# EAGLE board kosmoc_svf (EAGLE 9.6.2)
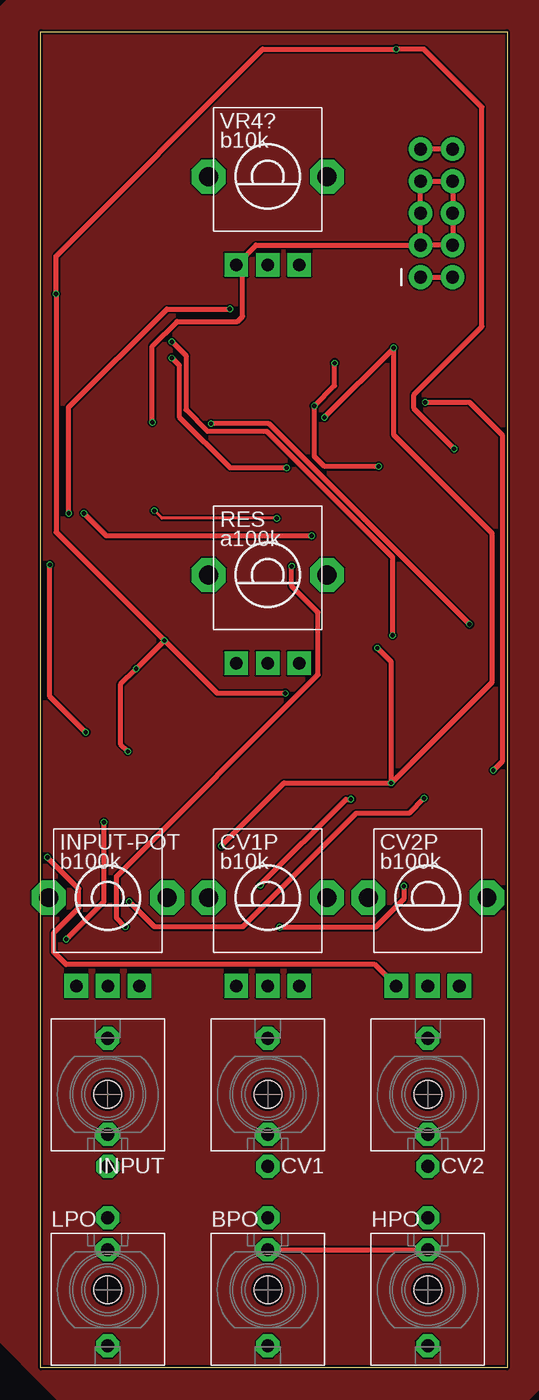
[diagram p0: board, top side]
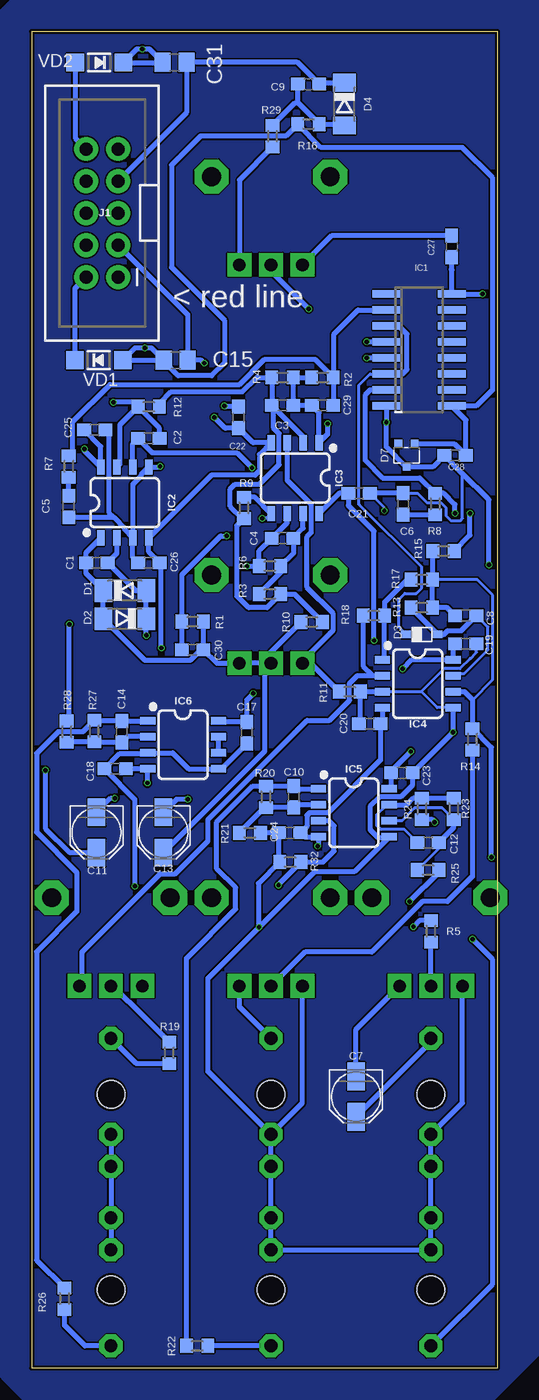
[diagram p1: board, bottom side, seen from below]

Size 37 x 106 mm. Coordinates in mm from the lower left corner, seen from the top.
Outline: 0,0 0,106 37,106 37,0 0,0
Copper layers (1*16): Top 0.035mm / dielectric 1.6mm / Bottom 0.035mm
Design rules "jlcpcb-2layers": minimum track width 5mil, minimum drill 0.3mm, track to track 5mil, track to pad 5mil, pad to pad 5mil, via to via 5mil, smd to smd 5mil, copper to edge 0.2mm, drill to drill 6mil, minimum pad ring 10mil, minimum via ring 3mil, stop-mask expansion 4mil, vias tented up to drill 0mil, thermal gap 10mil

## Footprints (pad centres in the part's own frame; a part is rotated, then mirrored left to right if it is on the bottom)
WQP_PJ_301M6 = drill 1.016 pad 1.778 octagon: P1 0,-5.715; P2 0,-3.175; P3 0,4.445 | hole 2.2: 0,0
C0603 = smd 1.1 x 1: 1 -0.85,0; 2 0.85,0
PANASONIC_B = smd 2.2 x 1.4: + 1.6,0; - -1.6,0
C0805 = smd 1.3 x 1.5: 1 -0.95,0; 2 0.95,0
ALPS_POT_VERTICAL_PS = drill 1 pad 1.88 square: P$1 -2.5,7; P$2 0,7; P$3 2.5,7 | drill 1.5 pad 2.54 octagon: P$4 -4.7,0; P$5 4.7,0
DIODE_SOD80C = smd 1.4 x 1.8: A 1.7,0; C -1.7,0
SOD323R-INFINEON = smd 0.8 x 0.6: A 1.25,0; C -1.25,0
SOT323 = smd 0.6 x 0.6: 1 -0.65,-0.925; 2 0.65,-0.925; 3 0,0.925
SOIC16N = smd 0.6 x 2.2: 1 -4.445,-2.6; 2 -3.175,-2.6; 3 -1.905,-2.6; 4 -0.635,-2.6; 5 0.635,-2.6; 6 1.905,-2.6; 7 3.175,-2.6; 8 4.445,-2.6; 9 4.445,2.6; 10 3.175,2.6; 11 1.905,2.6; 12 0.635,2.6; 13 -0.635,2.6; 14 -1.905,2.6; 15 -3.175,2.6; 16 -4.445,2.6
SO08 = smd 0.6 x 1.2: 1 -1.905,-2.8; 2 -0.635,-2.8; 3 0.635,-2.8; 4 1.905,-2.8; 5 1.905,2.8; 6 0.635,2.8; 7 -0.635,2.8; 8 -1.905,2.8
2X5-SHROUDED = drill 1.016 pad 1.88: 1 -1.27,5.08; 2 1.27,5.08; 3 -1.27,2.54; 4 1.27,2.54; 5 -1.27,0; 6 1.27,0; 7 -1.27,-2.54; 8 1.27,-2.54; 9 -1.27,-5.08; 10 1.27,-5.08
R0603 = smd 1 x 1.1: 1 -0.85,0; 2 0.85,0
SOD123 = smd 1.4 x 1.4: A 1.905,0; C -1.905,0

## Placement (x,y rotation side)
BPO  PJ301_THONKICONN6  [WQP_PJ_301M6]  18,6.2 180 top
C1  220p  [C0603]  31.82,63.88 180 bottom
C2  220p  [C0603]  27.7,73.72 0 bottom
C3  22p  [C0603]  17.08,76.34 0 bottom
C4  22p  [C0603]  17.08,65.82 0 bottom
C5  680p  [C0603]  34.05,68.32 90 bottom
C6  680p  [C0603]  7.51,68.53 270 bottom
C7  1u  [PANASONIC_B]  11.24,21.52 270 bottom
C8  560p  [C0603]  2.54,59.67 0 bottom
C9  100n  [C0603]  15.02,101.83 180 bottom
C10  22p  [C0603]  16.18,45.3 90 bottom
C11  2.2u  [PANASONIC_B]  31.84,42.47 270 bottom
C12  22p  [C0603]  5.53,41.67 180 bottom
C13  2.2u  [PANASONIC_B]  26.53,42.47 270 bottom
C14  22p  [C0603]  29.83,50.47 90 bottom
C15  10u X5R  [C0805]  25.57,79.93 0 bottom
C17  100n  [C0603]  19.91,50.38 90 bottom
C18  100n  [C0603]  30.37,47.53 180 bottom
C19  100n  [C0603]  2.54,57.45 180 bottom
C20  100n  [C0603]  10.16,51.1 180 bottom
C21  100n  [C0603]  11,69.38 180 bottom
C22  100n  [C0603]  20.57,75.39 90 bottom
C23  100n  [C0603]  7.61,47.2 180 bottom
C24  100n  [C0603]  16.5,42.44 180 bottom
C25  100n  [C0603]  31.99,74.42 180 bottom
C26  100n  [C0603]  27.7,63.88 180 bottom
C27  100n  [C0603]  3.66,88.95 270 bottom
C28  100n  [C0603]  3.38,72.39 180 bottom
C29  5p  [C0603]  13.91,76.34 0 bottom
C30  5p  [C0603]  24.22,56.98 180 bottom
C31  10u X5R  [C0805]  25.65,103.56 180 bottom
CV1  PJ301_THONKICONN6  [WQP_PJ_301M6]  18,21.7 0 top
CV1P  b10k  [ALPS_POT_VERTICAL_PS]  18,37.3 180 top
CV2  PJ301_THONKICONN6  [WQP_PJ_301M6]  30.7,21.7 0 top
CV2P  b100k  [ALPS_POT_VERTICAL_PS]  30.7,37.3 180 top
D1  4.7  [DIODE_SOD80C]  29.6,61.66 0 bottom
D2  4.7  [DIODE_SOD80C]  29.6,59.43 180 bottom
D3  1N4148WX-TP  [SOD323R-INFINEON]  6.03,58.19 0 bottom
D4  4.7  [DIODE_SOD80C]  12.16,100.24 270 bottom
D7  BAT854W  [SOT323]  7.24,72.39 180 bottom
HPO  PJ301_THONKICONN6  [WQP_PJ_301M6]  30.7,6.2 180 top
IC1  SSM2164S  [SOIC16N]  6.24,80.74 270 bottom
IC2  TL072  [SO08]  29.6,68.64 0 bottom
IC3  TL072  [SO08]  16.08,70.58 180 bottom
IC4  TL072  [SO08]  6.35,54.28 270 bottom
IC5  TL072  [SO08]  11.42,44.03 270 bottom
IC6  TL072  [SO08]  24.97,49.43 270 bottom
INPUT  PJ301_THONKICONN6  [WQP_PJ_301M6]  5.3,21.7 0 top
INPUT-POT  b100k  [ALPS_POT_VERTICAL_PS]  5.3,37.3 180 top
J1  [2X5-SHROUDED]  31.4,91.6 180 bottom
LPO  PJ301_THONKICONN6  [WQP_PJ_301M6]  5.3,6.2 180 top
R1  15k  [R0603]  24.22,59.2 180 bottom
R2  15k  [R0603]  13.91,78.56 0 bottom
R3  15k  [R0603]  18.08,61.37 0 bottom
R4  15k  [R0603]  17.08,78.56 0 bottom
R5  100k  [R0603]  5.29,34.63 90 bottom
R6  33k  [R0603]  18.08,63.59 0 bottom
R7  360  [R0603]  34.05,71.5 90 bottom
R8  360  [R0603]  4.97,68.53 90 bottom
R9  3k  [R0603]  20.15,68.22 270 bottom
R10  30k  [R0603]  14.77,59.17 0 bottom
R11  4k  [R0603]  11.75,53.64 180 bottom
R12  15k  [R0603]  27.7,76.24 180 bottom
R13  100k  [R0603]  6.03,60.31 180 bottom
R14  100k  [R0603]  2.02,49.86 90 bottom
R15  100k  [R0603]  4.3,64.8 180 bottom
R16  820  [R0603]  15.02,98.65 180 bottom
R17  100k  [R0603]  6.03,62.53 0 bottom
R18  100k  [R0603]  9.84,59.67 0 bottom
R19  270k  [R0603]  26.07,25 90 bottom
R20  68k  [R0603]  18.41,45.3 90 bottom
R21  22k  [R0603]  19.68,42.44 180 bottom
R22  1k  [R0603]  23.85,1.76 0 bottom
R23  33k  [R0603]  3.49,44.34 90 bottom
R24  1k  [R0603]  6.02,44.35 270 bottom
R25  22k  [R0603]  5.53,39.49 180 bottom
R26  1k  [R0603]  34.38,5.5 270 bottom
R27  33k  [R0603]  32.02,50.51 90 bottom
R28  22k  [R0603]  34.21,50.47 270 bottom
R29  2.7k  [R0603]  17.88,97.7 270 bottom
R32  17k  [R0603]  16.47,40.12 0 bottom
RES  a100k  [ALPS_POT_VERTICAL_PS]  18,62.9 180 top
VD1  SS12L  [SOD123]  31.66,79.94 0 bottom
VD2  SS12L  [SOD123]  31.63,103.53 180 bottom
VR4?  b10k  [ALPS_POT_VERTICAL_PS]  18,94.5 180 top

## Library data of the parts
BPO CV1 CV2 HPO INPUT LPO = og-pj301
C1-C15 C17-C31 = rcl; SPICEPREFIX: C
CV1P CV2P INPUT-POT RES VR4? = pot-alps
D1-D4 = Diode-SMD
D7 = nxp_60
IC1 = ssm2164
IC2-IC6 = SparkFun-IC-Amplifiers; PROD_ID: NA-XXXXX
J1 = SparkFun-Connectors; PROD_ID: CONN-08671; SF_ID: PRT-08506
R1-R29 R32 = rcl; SPICEPREFIX: R
VD1 VD2 = diode

## Nets
AGND: BPO.P1 BPO.P2 C5.1 C6.1 C9.1 C15.2 C17.1 C18.2 C19.1 C20.2 C21.1 C22.2 C23.1 C24.2 C25.1 C26.2 C27.1 C28.2 C31.1 CV1.P1 CV1.P2 CV1P.P$3 CV2.P1 CV2.P2 D4.C D7.3 HPO.P1 HPO.P2 IC1.8 IC2.3 IC2.5 IC3.5 IC4.3 IC4.5 IC5.5 IC6.3 IC6.5 INPUT-POT.P$3 INPUT.P1 INPUT.P2 J1.3 J1.4 J1.5 J1.6 J1.7 J1.8 LPO.P1 LPO.P2 R9.1 R11.1 R21.1 R32.1 VR4?.P$3
N$1: C1.1 D1.A D2.C IC1.4 IC2.2
N$2: C2.1 IC1.5 IC2.6
N$3: R15.1 VR4?.P$2
N$4: C30.2 IC1.7 R1.2 R8.2
N$5: C3.2 C29.1 IC3.1 R2.1 R4.2 R28.1
N$6: C29.2 IC1.2 R2.2 R7.2
N$7: C9.2 D4.A R16.1 R29.1
N$8: C4.2 IC3.7 R3.1 R6.2
N$9: C3.1 IC3.2 R3.2 R4.1 R9.2 R10.2 R12.1
N$10: C4.1 IC3.6 R5.2 R6.1
N$11: R29.2 VR4?.P$1
N$12: C2.2 C11.+ IC2.7 R12.2
N$13: C7.- INPUT-POT.P$1
N$14: C7.+ INPUT.P3
N$15: C5.2 R7.1
N$16: C6.2 R8.1
N$17: C8.2 D3.A IC4.7 R13.2
N$18: D3.C IC1.3 IC1.6
N$19: CV1P.P$2 R14.1
N$20: INPUT-POT.P$2 R5.1
N$21: CV1.P3 CV1P.P$1
N$22: HPO.P3 R26.2
N$23: IC4.1 R17.1 R18.2
N$24: LPO.P3 R24.2
N$25: BPO.P3 R22.2
N$26: C10.1 IC5.2 R20.1 R21.2
N$27: CV2.P3 R19.1
N$28: CV2P.P$2 R19.2
N$29: C10.2 IC5.1 R20.2 R22.1
N$30: C13.- IC5.3 R32.2
N$31: C12.1 IC5.6 R23.1 R25.2
N$33: C12.2 IC5.7 R23.2 R24.1
N$34: C11.- R25.1
N$37: IC6.6 IC6.7
N$39: C14.2 IC6.1 R26.1 R27.2
N$40: C14.1 IC6.2 R27.1 R28.2
N$42: J1.1 J1.2 VD1.C
N$43: J1.9 J1.10 VD2.A
TO_CV2_POT1: C8.1 CV2P.P$3 IC4.6 R13.1 R14.2 R15.2 R17.2
TO_CV2_POT2: CV2P.P$1 IC4.2 R18.1
TO_RESO_POT1: C1.2 C13.+ C30.1 D1.C D2.A IC2.1 R1.1 R10.1 RES.P$1 RES.P$2
TO_RESO_POT2: IC3.3 R11.2 RES.P$3
V+: C17.2 C19.2 C21.2 C23.2 C25.2 C27.2 C31.2 IC1.16 IC2.8 IC3.8 IC4.8 IC5.8 IC6.8 VD2.C
V-: C15.1 C18.1 C20.1 C22.1 C24.1 C26.1 C28.1 D7.1 IC1.9 IC2.4 IC3.4 IC4.4 IC5.4 IC6.4 R16.2 VD1.A

## Tracks (layer width: path | path; a pad name or v marks a point on that pad's centre or on a via)
AGND  (via drill 0.35)
  Top 0.254: v18.7,67.4 9.6,67.4 v9,68
  Top 0.406: J1.3 J1.4 J1.6 J1.8 J1.7 J1.5 J1.3 | BPO.P2 HPO.P2 | J1.3 17.06,89.06 VR4?.P$3 16,87 16,83.4 15.6,83 10.8,83 8.84,81.04 v8.84,75 | v23.3,79.7 23.3,77.9 v21.7,76.3 21.7,72.3 22.5,71.5 v26.8,71.5 | v28.8,38.2 28.8,37.2 26.55,34.95 v18.95,34.95 | v3.55,50.41 0.7,53.27 v0.7,63.7
  Bottom 0.254: C19.1 1.69,56.75 2.2,56.25 2.2,56.28 3.01,55.47 4.25,55.47 6.08,53.64 | IC4.3 6.08,53.64 | IC4.5 4.81,52.37 6.08,53.64 | C6.1 6.38,69.38 5.62,68.63 4.51,68.63 4.11,68.23 4.11,67.59 3.71,67.19 2.99,67.19 2.79,67.39 2.79,70.95 | IC3.5 18.37,67.4 v18.7,67.4 | v9,68 9,68.22 C21.1
  Bottom 0.406: J1.3 24.61,83.55 C15.2 23.53,79.93 v23.3,79.7 | J1.7 24.7,99.56 C31.1 15.9,103.56 C9.1 14.06,101.94 D4.C | C26.2 28.96,64.3 IC2.3 | IC2.3 29.61,66.48 29.61,66.58 30.5,67.47 | C5.1 30.5,67.47 | IC2.3 28.96,70.07 28.34,70.7 28.34,70.8 IC2.5 26.86,71.44 v26.8,71.5 | C20.2 10.9,51.22 R11.1 IC4.3 | C17.1 21.91,47.53 IC6.5 24.53,47.53 25.8,48.8 IC6.3 27.83,48.74 30.01,48.74 C18.2 28.8,45.11 v28.8,38.2 | R21.1 C24.2 17.35,40.16 R32.1 19,38.44 19,35 v18.95,34.95 | CV1.P2 CV1.P1 BPO.P1 BPO.P2 LPO.P2 LPO.P1 INPUT.P1 INPUT.P2 2.8,21.02 INPUT-POT.P$3 | CV2.P2 CV2.P1 HPO.P1 HPO.P2 | CV1.P2 15.5,21.02 CV1P.P$3 | C27.1 13.2,89.8 VR4?.P$3 | IC4.5 v3.55,50.41 C23.1 6.79,47.17 6.79,46.2 7.69,45.3 9.36,45.3 10.13,44.52 10.13,42.7 9.52,42.08 8.66,42.08 IC5.5 11.35,39.4 14.5,39.4 v18.95,34.95 | C22.2 21.64,76.24 v21.7,76.3 | C25.1 31.14,74.37 30.88,74.11 30.88,67.85 30.5,67.47 | IC3.5 19.27,69.07 R9.1 | C6.1 C21.1 | CV1.P2 23,23.52 23,30.9 v18.95,34.95 | IC1.8 v8.84,75 8.84,73.06 D7.3 5.16,71.47 C28.2 2.79,70.95 0.7,68.86 v0.7,63.7
GND
  pour Bottom: 34,-6 41,1 41,3 41,106 37,110 -2,110 -5,107 -5,3 0,-2 4,-6
  pour Top: 35,-6 42,1 42,3 42,106 38,110 -1,110 -4,107 -4,3 1,-2 5,-6
N$1  (via drill 0.35)
  Top 0.406: v10.4,81.4 11.5,80.3 11.5,76 13.2,74.3 17.9,74.3 27.9,64.3 v27.9,58.1
  Bottom 0.406: IC2.2 30.23,64.61 C1.1 28.75,61.66 D1.A D2.C v27.9,58.1 | IC1.4 10.38,81.38 v10.4,81.4
N$2  (via drill 0.35)
  Top 0.406: v19.5,71.4 15,71.4 10.97,75.43 10.97,79.53 v10.4,80.1
  Bottom 0.406: IC2.6 28.96,73.3 C2.1 27.43,72.6 20.7,72.6 v19.5,71.4 | IC1.5 v10.39,80.11 v10.4,80.1
N$3  (via drill 0.35)
  Top 0.406: v2.2,67.8 2.2,76.2 10,84 v15,84
  Bottom 0.406: R15.1 2.2,66.05 v2.2,67.8 | v15,84 18,87 VR4?.P$2
N$4  (via drill 0.35)
  Top 0.406: v21.5,66 5.2,66 v3.4,67.8
  Bottom 0.406: C30.2 R1.2 25.07,62.93 22,66 v21.5,66 | v3.4,67.8 3.4,68.5 4.28,69.38 R8.2 6.19,70.6 9.14,70.6 10.54,72 10.54,77.16 10.13,77.56 IC1.7
N$5  (via drill 0.35)
  Top 0.406: v34,59 18.1,74.9 v13.5,74.9
  Bottom 0.406: R2.1 R4.2 C3.2 C29.1 14.18,75.76 IC3.1 13.5,74.06 v13.5,74.9 | R28.1 34,51.53 v34,59
N$6
  Bottom 0.406: R2.2 C29.2 | R2.2 13,78.62 13,82 11.09,83.92 IC1.2 | R7.2 33.72,72.67 33.72,75.06 30.77,78 20.5,78 18.5,80 14.49,80 R2.2
N$7
  Bottom 0.406: D4.A 12.28,98.65 R16.1 15.87,100.35 | 15.87,100.35 C9.2 | R29.1 16.07,100.35 15.87,100.35
N$8
  Bottom 0.406: IC3.7 15.45,66.6 C4.2 16.23,64.59 R6.2 17.23,63.07 R3.1
N$9
  Bottom 0.406: IC3.2 15.45,73.86 17.8,76.2 | 17.8,76.2 C3.1 R4.1 19.13,78.56 20.28,77.42 25.91,77.42 26.84,76.49 R12.1 | R10.2 16.11,61.37 R3.2 18.3,60.3 19.78,60.3 20.7,61.22 20.7,66.82 R9.2 20.27,67.37 21.23,68.33 21.23,69.7 20.84,70.1 18.9,70.1 17.36,71.64 17.36,74.12 17.8,74.55 17.8,76.2
N$10  (via drill 0.35)
  Top 0.406: v6.7,35 6,35.7 6,39 22,55 22,59.92 19.9,62.02 v19.9,63.6
  Bottom 0.406: IC3.6 16.72,67.03 C4.1 18.93,64.82 R6.1 v19.89,63.59 v19.9,63.6 | R5.2 6.22,35.48 v6.7,35
N$11
  Bottom 0.406: R29.2 20.5,94.23 VR4?.P$1
N$12  (via drill 0.35)
  Top 0.406: v30.5,76.6 34,76.6 36.6,74 36.6,48.1 v35.9,47.4
  Bottom 0.406: R12.2 30,74.79 30,71.67 IC2.7 | C2.2 26.84,74.54 R12.2 | R12.2 28.9,76.6 v30.5,76.6 | v35.9,47.4 35.9,42.8 33.97,40.87 C11.+
N$13
  Bottom 0.406: C7.- 11.24,26.86 INPUT-POT.P$1
N$14
  Bottom 0.406: C7.+ 5.3,25.86 INPUT.P3
N$15
  Bottom 0.406: C5.2 R7.1
N$16
  Bottom 0.406: C6.2 R8.1
N$17
  Bottom 0.254: IC4.7 3.38,55.09 2.65,55.09 0.78,56.95 0.78,58.77 C8.2
  Bottom 0.406: C8.2 2.88,58.48 3.98,58.48 4.27,58.19 D3.A 4.78,58.21 R13.2 6.88,60.29
N$18
  Bottom 0.254: D3.C 7.28,58.2 7.84,58.76 7.84,60.97 7.37,61.43 6.48,61.43 6.03,61.88 6.03,63.53 11,68.5 11,77.96 10.13,78.83 IC1.6
  Bottom 0.406: IC1.6 7.56,78.83 7.2,79.2 7.2,82 7.85,82.64 IC1.3
N$19
  Bottom 0.406: R14.1 2.02,38.98 4,37 6,37 10,33 15.3,33 CV1P.P$2
N$20
  Bottom 0.406: INPUT-POT.P$2 R5.1
N$21
  Bottom 0.406: CV1.P3 20.5,28.64 CV1P.P$1
N$22
  Bottom 0.406: HPO.P3 32.76,1.75 34.38,3.38 R26.2
N$23
  Bottom 0.406: R17.1 7.18,62.53 8.99,60.72 R18.2 8.99,56.34 IC4.1
N$24  (via drill 0.35)
  Top 0.406: v2,34 5,37 v5,43.3
  Bottom 0.406: LPO.P3 0.4,6.65 0.4,32.4 v2,34 | v5,43.3 5.2,43.5 R24.2
N$25
  Bottom 0.406: BPO.P3 R22.2
N$26
  Bottom 0.406: IC5.2 15.97,44.66 C10.1 R20.1 18.52,44.45 R21.2
N$27
  Bottom 0.406: CV2.P3 28.7,24.14 R19.1
N$28
  Bottom 0.406: R19.2 29.25,29.03 29.28,29.03 30.55,30.3 CV2P.P$2
N$29
  Bottom 0.406: IC5.1 15.97,45.94 C10.2 R20.2 19.45,46.15 22.3,43.3 22.3,39.6 20.8,38.1 20.8,36.4 24.7,32.5 R22.1
N$30  (via drill 0.35)
  Top 0.406: v17.4,38.3 24.2,45.1 v24.6,45.1
  Bottom 0.406: IC5.3 13.39,43.4 13,43 13,41 13.88,40.12 R32.2 17.4,38.34 v17.4,38.3 | v24.6,45.1 25.5,45.1 C13.-
N$31
  Bottom 0.254: R23.1 4.4,44.4 6.6,44.4 7.61,43.4 IC5.6 | R25.2 4.68,41.19 C12.1
  Bottom 0.406: C12.1 3.49,42.85 R23.1
N$33
  Bottom 0.254: C12.2 7.45,42.74 9.32,42.74 9.57,42.99 9.57,43.9 8.81,44.66 IC5.7
  Bottom 0.406: R23.2 R24.1 6.69,45.2 7.22,44.66 IC5.7
N$34  (via drill 0.35)
  Top 0.406: v30.4,45.2 29.2,44 25,44 16,35 9,35 v7,37
  Bottom 0.406: C11.- 30.71,45.2 v30.4,45.2 | v7,37 4.68,39.32 R25.1
N$37
  Bottom 0.406: IC6.6 IC6.7
N$39
  Bottom 0.406: IC6.1 27.79,51.32 C14.2 31.97,51.32 R27.2 32.93,50.45 34.9,50.45 36.6,48.75 36.6,42.5 33.4,39.3 33.4,36.2 36.6,33 36.6,8.56 R26.1
N$40
  Bottom 0.406: R28.2 34.16,49.66 R27.1 31.97,49.62 C14.1 29.38,50.07 IC6.2
N$42
  Top 0.406: J1.1 J1.2
  Bottom 0.406: J1.2 33.56,85.62 VD1.C
N$43
  Top 0.406: J1.10 J1.9
  Bottom 0.406: VD2.A 33.53,97.54 J1.10
TO_CV2_POT1  (via drill 0.35)
  Top 0.406: CV2P.P$3 26.5,32 2,32 1,33 1,34.5 3,36.5 3,38 v0.5,40.5
  Bottom 0.254: 2,53 0.4,54.6 0.4,61.3 1.63,62.53 R17.2
  Bottom 0.406: IC4.6 2.64,53.64 2,53 2,50.72 | 2,50.72 R14.2 | C8.1 4.03,60.31 R13.1 R17.2 5.15,62.56 R15.2 | v0.5,40.5 0.5,49.22 2,50.72
TO_CV2_POT2
  Bottom 0.406: R18.1 10.69,55.69 9.91,54.91 IC4.2 11.14,54.91 11.77,54.29 11.77,52.96 13.36,51.36 15.14,51.36 23,43.5 23,41.8 25.6,39.2 26.8,39.2 33,33 33,30.5 CV2P.P$1
TO_RESO_POT1
  Bottom 0.406: R1.1 C30.1 | C30.1 22.29,55.9 RES.P$1 RES.P$2 | C30.1 23.55,56.98 24.38,56.15 28.02,56.15 D2.A D1.C 32.67,63.03 C1.2 32.67,64.67 IC2.1 | R10.1 18,56.79 RES.P$2 | C13.+ 18.5,48.91 18.5,55.4 RES.P$2
TO_RESO_POT2
  Bottom 0.406: R11.2 14.86,55.9 RES.P$3 15.5,56.08 13.09,58.49 13.09,59.86 15.18,61.95 15.18,65.89 14.82,66.26 14.82,68.52 16.72,70.42 IC3.3
V+  (via drill 0.35)
  Top 0.406: v6.9,48.9 6.3,49.5 6.3,54.2 v7.55,55.45 v9.8,57.7 | v9.8,57.7 1.2,66.3 v1.2,85.2 1.2,88.2 17.6,104.6 v28.2,104.6 30.4,104.6 35,100 35,82.6 29.6,77.2 29.6,76.1 v32.8,72.9 | v19.4,53.5 14,53.5 v9.8,57.7
  Bottom 0.406: C25.2 31.51,73.09 IC2.8 32.8,72.73 v32.8,72.9 | C19.2 3.55,57.29 IC4.8 6.82,56.18 v7.55,55.45 | C27.2 3.66,87.23 3.7,87.14 3.64,87.08 IC1.16 1.21,85.19 v1.2,85.2 | IC6.8 22.07,51.23 C17.2 19.91,52.99 v19.4,53.5 | IC5.8 8.46,46.09 C23.2 8.46,47.34 v6.9,48.9 | v9.8,57.7 9.82,57.72 9.82,66.38 11.86,68.41 11.86,69.37 C21.2 12,69.38 12.58,69.38 IC3.8 | VD2.C 26.62,103.53 C31.2 27.64,104.6 v28.2,104.6 28.66,104.6 VD2.C
V-  (via drill 0.35)
  Top 0.406: v14.3,41.4 19.3,46.4 v27.8,46.4 | v27.8,46.4 27.8,56 v26.7,57.1 | v22.5,75.4 v28,80.9 28,74 35.8,66.2 35.8,54.4 v27.8,46.4
  Bottom 0.406: 26.6,79.94 VD1.A 28.79,80.9 v28,80.9 27.49,80.9 C15.1 26.6,79.94 | IC4.4 9.15,51.26 C20.1 9.31,48.21 13.49,44.02 14.96,44.02 15.15,43.83 15.15,42.94 C24.1 15.33,42.12 IC5.4 14.22,41.48 v14.3,41.4 | D7.1 3.46,73.31 C28.1 2.53,75.19 IC1.9 1.71,76.3 0.4,77.6 0.4,94.4 2.8,96.8 14.02,96.8 R16.2 16.82,97.7 23.6,97.7 25.9,95.4 25.9,87.3 21.7,83.1 21.7,79.7 22.7,78.7 25.36,78.7 26.6,79.94 | C18.1 IC6.4 27.8,47.5 v27.8,46.4 | v26.7,57.1 26.7,63.73 C26.1 27.7,64.73 IC2.4 22.72,70.82 19.26,70.82 18.92,71.16 18.92,72.45 IC3.4 19.41,73.38 C22.1 21.64,74.54 v22.5,75.4

## Text on the board
bPlace: < red line